# EAGLE board connectionDiagramTransmitterBoard (EAGLE 8.5.0)

Size 100 x 80 mm. Coordinates in mm from the lower left corner, seen from the top.
Outline: 0,0 100,0 100,80 0,80 0,0
Copper layers (1*16): Top 0.035mm / dielectric 1.5mm / Bottom 0.035mm
Design rules "default": minimum track width 6mil, minimum drill 0.35mm, track to track 6mil, track to pad 6mil, pad to pad 6mil, via to via 6mil, smd to smd 6mil, copper to edge 40mil, drill to drill 6mil, minimum pad ring 10mil, minimum via ring 8mil, stop-mask expansion 4mil, vias tented up to drill 0mil, thermal gap 10mil

## Footprints (pad centres in the part's own frame; a part is rotated, then mirrored left to right if it is on the bottom)
C2.5-3 = drill 0.813 pad 1.6 octagon: 1 -1.27,0; 2 1.27,0
1X04 = drill 1.016 long: 1 -3.81,0; 2 -1.27,0; 3 1.27,0; 4 3.81,0
1X05 = drill 1.016 long: 1 -5.08,0; 2 -2.54,0; 3 0,0; 4 2.54,0; 5 5.08,0
1X03 = drill 1.016 long: 1 -2.54,0; 2 0,0; 3 2.54,0
1X02 = drill 1.016 long: 1 -1.27,0; 2 1.27,0

## Placement (x,y rotation side)
C1  [C2.5-3]  22.86,62.23 0 top
C2  [C2.5-3]  5.08,64.77 0 top
JOYSTICK  [1X04]  35.56,48.26 0 top
JP1  [1X05]  34.29,29.21 0 top
NADAJNIK  [1X03]  7.62,50.8 0 top
REGULATOR9V  [1X03]  12.7,68.58 180 top
ZASILANIE12V  [1X02]  10.16,76.2 180 top

## Library data of the parts
C1 C2 = capacitor-wima
JOYSTICK JP1 NADAJNIK REGULATOR9V ZASILANIE12V = pinhead

## Nets
N$1: C1.2 C2.1 NADAJNIK.1 REGULATOR9V.2 ZASILANIE12V.1
N$2: C2.2 REGULATOR9V.3 ZASILANIE12V.2
N$3: JOYSTICK.1 JP1.5
N$4: JOYSTICK.2 JP1.4
N$5: JOYSTICK.3 JP1.3
N$6: JOYSTICK.4 JP1.2
N$7: JP1.1 NADAJNIK.3
N$8: C1.1 NADAJNIK.2 REGULATOR9V.1

## Tracks (layer width: path | path; a pad name or v marks a point on that pad's centre or on a via)
N$1  (4 unrouted)
N$2  (2 unrouted)
N$3  (1 unrouted)
N$4  (1 unrouted)
N$5  (1 unrouted)
N$6  (1 unrouted)
N$7  (1 unrouted)
N$8  (2 unrouted)